# EAGLE board PCB_v29 (EAGLE 9.7.0)
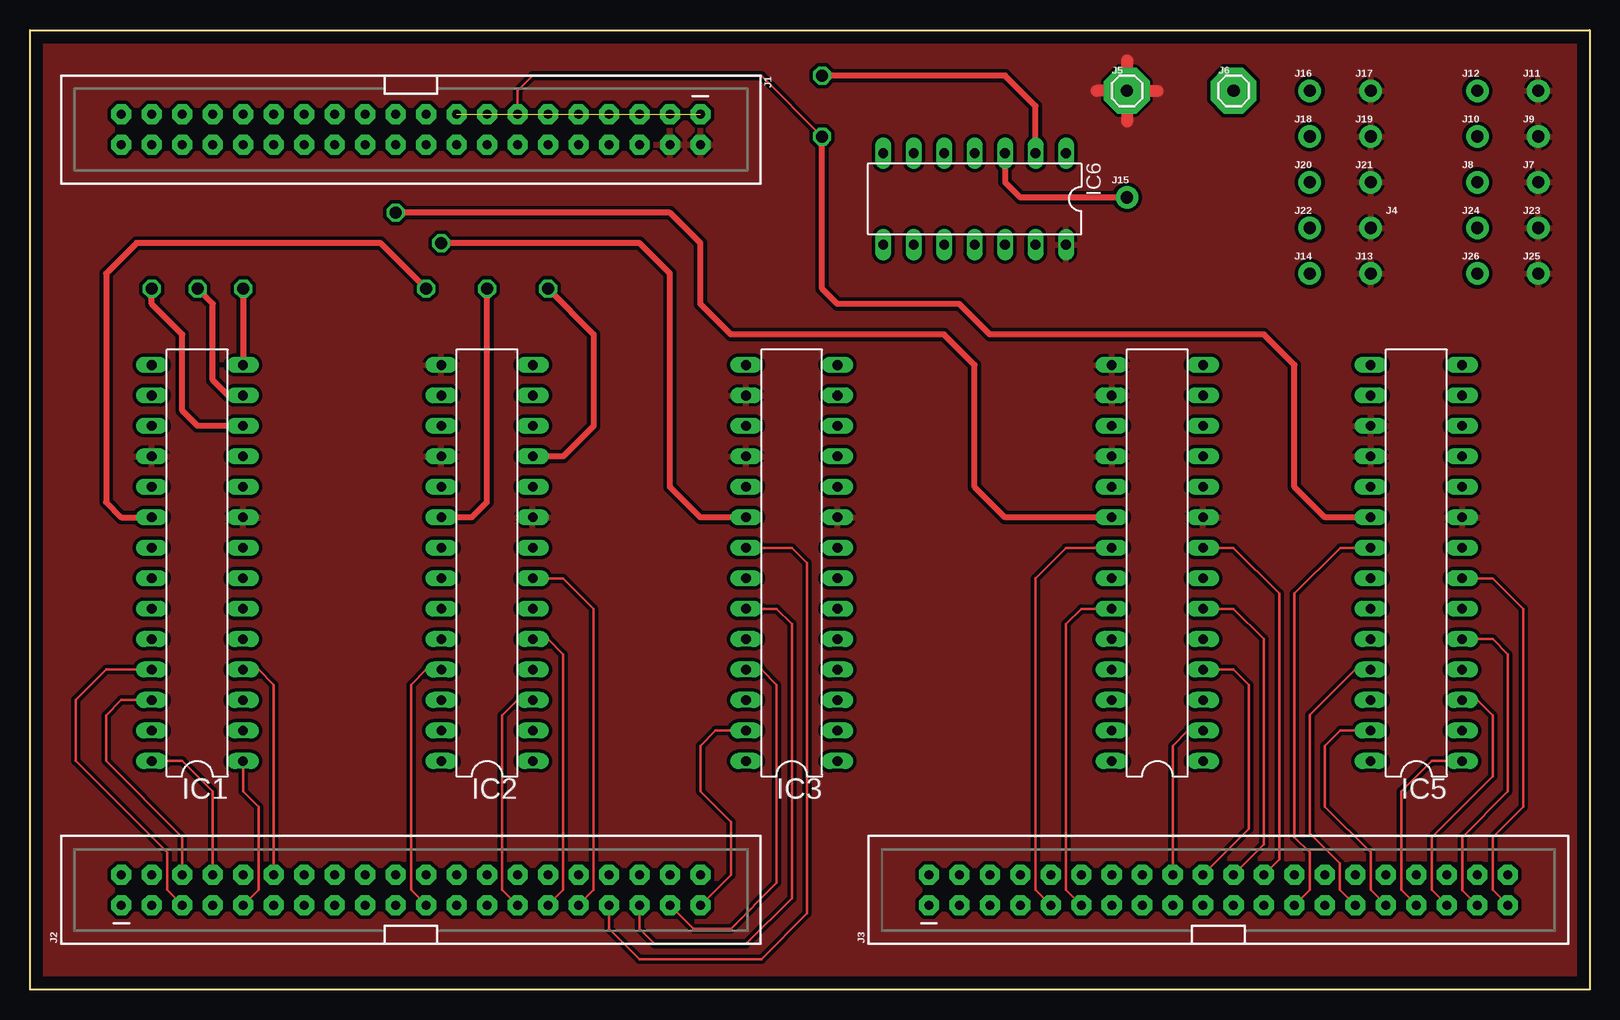
[diagram p0: board, top side]
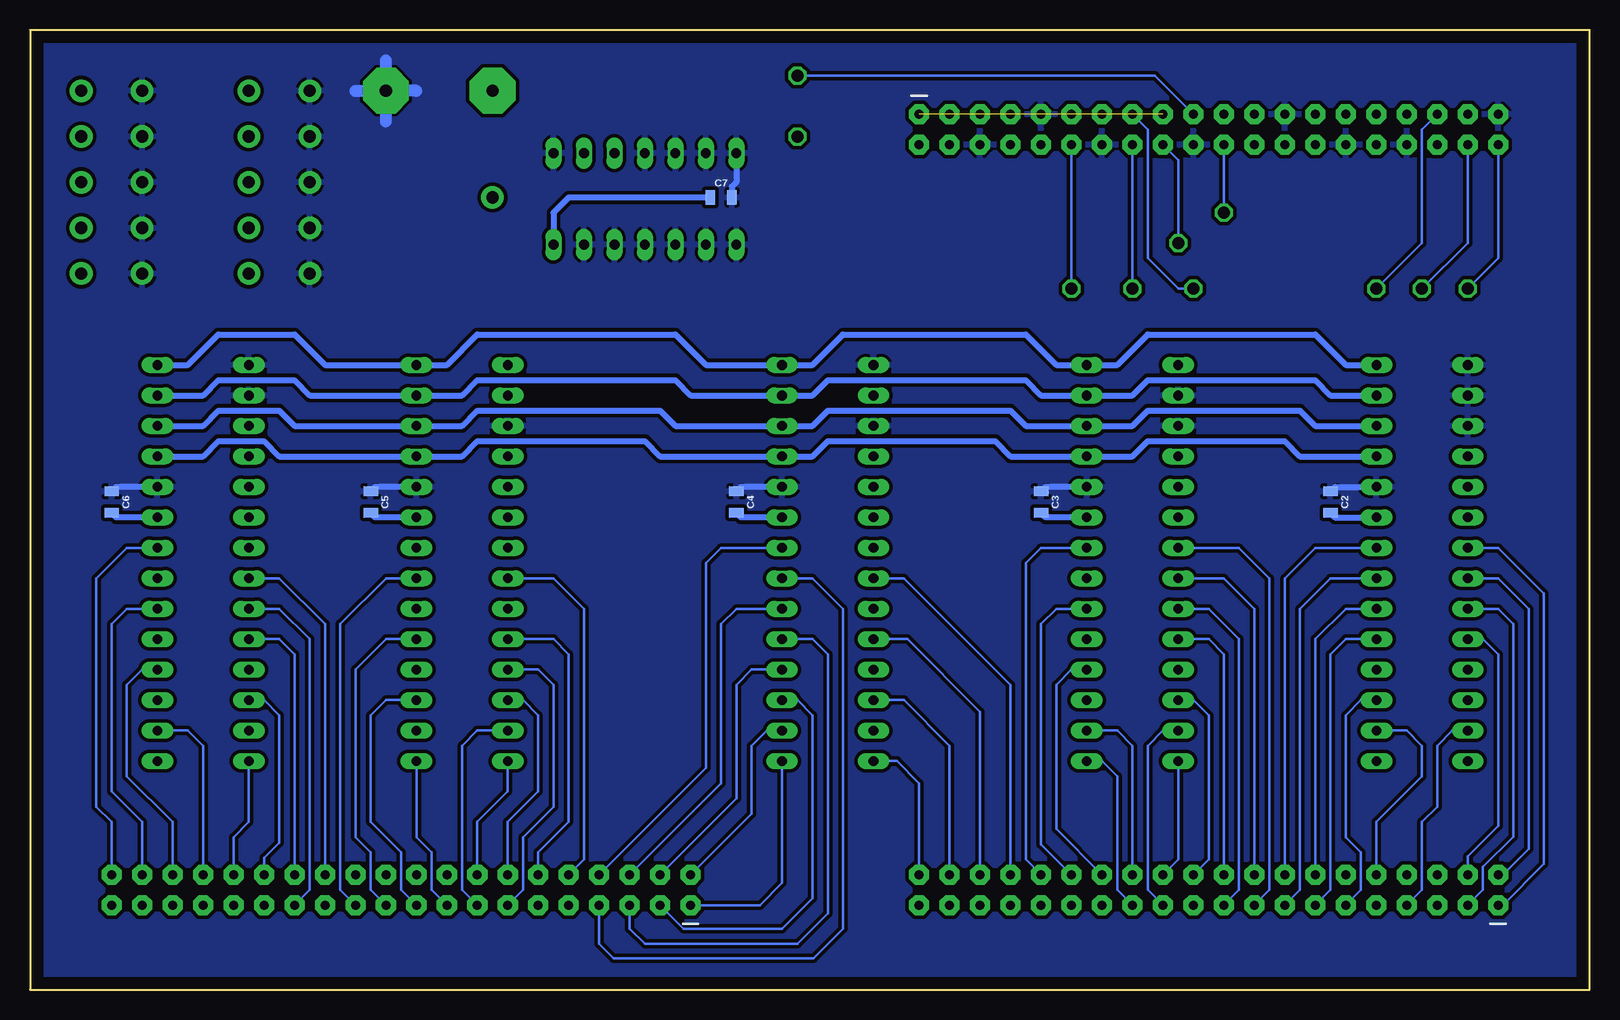
[diagram p1: board, bottom side, seen from below]

Size 130 x 80 mm. Coordinates in mm from the lower left corner, seen from the top.
Outline: 0,0 0,80 130,80 130,0 0,0
Copper layers (1*16): Top 0.035mm / dielectric 1.5mm / Bottom 0.035mm
Design rules "default": minimum track width 6mil, minimum drill 0.35mm, track to track 6mil, track to pad 6mil, pad to pad 6mil, via to via 6mil, smd to smd 6mil, copper to edge 40mil, drill to drill 6mil, minimum pad ring 10mil, minimum via ring 8mil, stop-mask expansion 4mil, vias tented up to drill 0mil, thermal gap 10mil

## Footprints (pad centres in the part's own frame; a part is rotated, then mirrored left to right if it is on the bottom)
0805 = smd 0.8 x 1.2: 1 -0.9,0; 2 0.9,0
DIL28-3 = drill 0.813 long: 1 -16.51,-3.81; 2 -13.97,-3.81; 3 -11.43,-3.81; 4 -8.89,-3.81; 5 -6.35,-3.81; 6 -3.81,-3.81; 7 -1.27,-3.81; 8 1.27,-3.81; 9 3.81,-3.81; 10 6.35,-3.81; 11 8.89,-3.81; 12 11.43,-3.81; 13 13.97,-3.81; 14 16.51,-3.81; 15 16.51,3.81; 16 13.97,3.81; 17 11.43,3.81; 18 8.89,3.81; 19 6.35,3.81; 20 3.81,3.81; 21 1.27,3.81; 22 -1.27,3.81; 23 -3.81,3.81; 24 -6.35,3.81; 25 -8.89,3.81; 26 -11.43,3.81; 27 -13.97,3.81; 28 -16.51,3.81
DIL14 = drill 0.813 long: 1 -7.62,-3.81; 2 -5.08,-3.81; 3 -2.54,-3.81; 4 0,-3.81; 5 2.54,-3.81; 6 5.08,-3.81; 7 7.62,-3.81; 8 7.62,3.81; 9 5.08,3.81; 10 2.54,3.81; 11 0,3.81; 12 -2.54,3.81; 13 -5.08,3.81; 14 -7.62,3.81
2X20_SHROUDED = drill 0.75 pad 1.676 octagon: 1 -1.27,24.13; 2 1.27,24.13; 3 -1.27,21.59; 4 1.27,21.59; 5 -1.27,19.05; 6 1.27,19.05; 7 -1.27,16.51; 8 1.27,16.51; 9 -1.27,13.97; 10 1.27,13.97; 11 -1.27,11.43; 12 1.27,11.43; 13 -1.27,8.89; 14 1.27,8.89; 15 -1.27,6.35; 16 1.27,6.35; 17 -1.27,3.81; 18 1.27,3.81; 19 -1.27,1.27; 20 1.27,1.27; 21 -1.27,-1.27; 22 1.27,-1.27; 23 -1.27,-3.81; 24 1.27,-3.81; 25 -1.27,-6.35; 26 1.27,-6.35; 27 -1.27,-8.89; 28 1.27,-8.89; 29 -1.27,-11.43; 30 1.27,-11.43; 31 -1.27,-13.97; 32 1.27,-13.97; 33 -1.27,-16.51; 34 1.27,-16.51; 35 -1.27,-19.05; 36 1.27,-19.05; 37 -1.27,-21.59; 38 1.27,-21.59; 39 -1.27,-24.13; 40 1.27,-24.13
1X01_NO_SILK = drill 1.016 pad 1.88: 1 0,0
1X01 = drill 1.016 pad 3.81 octagon: 1 0,0

## Placement (x,y rotation side)
C2  100nF  [0805]  21.59,40.64 270 bottom
C3  100nF  [0805]  45.72,40.64 270 bottom
C4  100nF  [0805]  71.12,40.64 270 bottom
C5  100nF  [0805]  101.6,40.64 270 bottom
C6  100nF  [0805]  123.19,40.64 270 bottom
C7  100nF  [0805]  72.39,66.04 0 bottom
IC1  MCP23S17SP  [DIL28-3]  13.95,35.56 90 top
IC2  MCP23S17SP  [DIL28-3]  38.1,35.56 90 top
IC3  MCP23S17SP  [DIL28-3]  63.5,35.56 90 top
IC4  MCP23S17SP  [DIL28-3]  93.98,35.56 90 top
IC5  MCP23S17SP  [DIL28-3]  115.57,35.56 90 top
IC6  74125N  [DIL14]  78.74,65.91 180 top
J1  RASPBERRYPI-40-PIN-GPIO_PTH  [2X20_SHROUDED]  31.75,71.7 270 top
J2  CONN_20X2SHROUDED  [2X20_SHROUDED]  31.75,8.31 90 top
J3  CONN_20X2SHROUDED  [2X20_SHROUDED]  99.06,8.31 90 top
J4  [1X01_NO_SILK]  111.76,63.5 0 top
J5  [1X01]  91.44,74.93 0 top
J6  [1X01]  100.33,74.93 0 top
J7  [1X01_NO_SILK]  125.73,67.31 0 top
J8  [1X01_NO_SILK]  120.65,67.31 0 top
J9  [1X01_NO_SILK]  125.73,71.12 0 top
J10  [1X01_NO_SILK]  120.65,71.12 0 top
J11  [1X01_NO_SILK]  125.73,74.93 0 top
J12  [1X01_NO_SILK]  120.65,74.93 0 top
J13  [1X01_NO_SILK]  111.76,59.69 0 top
J14  [1X01_NO_SILK]  106.68,59.69 0 top
J15  [1X01_NO_SILK]  91.44,66.04 0 top
J16  [1X01_NO_SILK]  106.68,74.93 0 top
J17  [1X01_NO_SILK]  111.76,74.93 0 top
J18  [1X01_NO_SILK]  106.68,71.12 0 top
J19  [1X01_NO_SILK]  111.76,71.12 0 top
J20  [1X01_NO_SILK]  106.68,67.31 0 top
J21  [1X01_NO_SILK]  111.76,67.31 0 top
J22  [1X01_NO_SILK]  106.68,63.5 0 top
J23  [1X01_NO_SILK]  125.73,63.5 0 top
J24  [1X01_NO_SILK]  120.65,63.5 0 top
J25  [1X01_NO_SILK]  125.73,59.69 0 top
J26  [1X01_NO_SILK]  120.65,59.69 0 top

## Library data of the parts
C2-C7 = SparkFun-Capacitors; PROD_ID: CAP-08469
IC1-IC5 = microchip; MF: MICROCHIP; MPN: MCP23S17-E/SP; OC_FARNELL: 1292238; OC_NEWARK: 31K2951
IC6 = 74xx-eu
J1 = SparkFun-Connectors_Ladestation; PROD_ID: CONN-12263; SF_ID: PRT-13054
J2 J3 = SparkFun-Connectors_Ladestation; PROD_ID: CONN-12263; SF_ID: CONN-12263
J4-J26 = SparkFun-Connectors_Ladestation

## Nets
3.3V: J1.1 J1.17
5V: C2.2 C3.2 C4.2 C5.2 C6.2 C7.1 IC1.9 IC1.18 IC2.9 IC2.15 IC2.18 IC3.9 IC3.16 IC3.18 IC4.9 IC4.15 IC4.16 IC4.18 IC5.9 IC5.17 IC5.18 IC6.14 J1.2 J1.4 J4.1 J5.1 J7.1 J9.1 J11.1 J13.1 J17.1 J19.1 J21.1 J23.1 J25.1
B$1: IC1.21 J2.1
B$2: IC1.22 J2.2
B$3: IC1.23 J2.3
B$4: IC1.24 J2.4
B$5: IC1.25 J2.5
B$6: IC1.26 J2.6
B$7: IC1.27 J2.7
B$8: IC1.28 J2.8
B$9: IC1.1 J2.9
B$10: IC1.2 J2.10
B$11: IC1.3 J2.11
B$12: IC1.4 J2.12
B$13: IC1.5 J2.13
B$14: IC1.6 J2.14
B$15: IC1.7 J2.15
B$16: IC1.8 J2.16
B$17: IC2.21 J2.17
B$18: IC2.22 J2.18
B$19: IC2.23 J2.19
B$20: IC2.24 J2.20
B$21: IC2.25 J2.21
B$22: IC2.26 J2.22
B$23: IC2.27 J2.23
B$24: IC2.28 J2.24
B$25: IC2.1 J2.25
B$26: IC2.2 J2.26
B$27: IC2.3 J2.27
B$28: IC2.4 J2.28
B$29: IC2.5 J2.29
B$30: IC2.6 J2.30
B$31: IC2.7 J2.31
B$32: IC2.8 J2.32
B$33: IC3.21 J2.33
B$34: IC3.22 J2.34
B$35: IC3.23 J2.35
B$36: IC3.24 J2.36
B$37: IC3.25 J2.37
B$38: IC3.26 J2.38
B$39: IC3.27 J2.39
B$40: IC3.28 J2.40
B$41: IC3.1 J3.1
B$42: IC3.2 J3.2
B$43: IC3.3 J3.3
B$44: IC3.4 J3.4
B$45: IC3.5 J3.5
B$46: IC3.6 J3.6
B$47: IC3.7 J3.7
B$48: IC3.8 J3.8
B$49: IC4.21 J3.9
B$50: IC4.22 J3.10
B$51: IC4.23 J3.11
B$52: IC4.24 J3.12
B$53: IC4.25 J3.13
B$54: IC4.26 J3.14
B$55: IC4.27 J3.15
B$56: IC4.28 J3.16
B$57: IC4.1 J3.17
B$58: IC4.2 J3.18
B$59: IC4.3 J3.19
B$60: IC4.4 J3.20
B$61: IC4.5 J3.21
B$62: IC4.6 J3.22
B$63: IC4.7 J3.23
B$64: IC4.8 J3.24
B$65: IC5.21 J3.25
B$66: IC5.22 J3.26
B$67: IC5.23 J3.27
B$68: IC5.24 J3.28
B$69: IC5.25 J3.29
B$70: IC5.26 J3.30
B$71: IC5.27 J3.31
B$72: IC5.28 J3.32
B$73: IC5.1 J3.33
B$74: IC5.2 J3.34
B$75: IC5.3 J3.35
B$76: IC5.4 J3.36
B$77: IC5.5 J3.37
B$78: IC5.6 J3.38
B$79: IC5.7 J3.39
B$80: IC5.8 J3.40
CS: IC1.11 IC2.11 IC3.11 IC4.11 IC5.11 J1.12
GND: C2.1 C3.1 C4.1 C5.1 C6.1 C7.2 IC1.10 IC1.15 IC1.16 IC1.17 IC2.10 IC2.16 IC2.17 IC3.10 IC3.15 IC3.17 IC4.10 IC4.17 IC5.10 IC5.15 IC5.16 IC6.1 IC6.4 IC6.5 IC6.6 IC6.7 IC6.8 IC6.9 IC6.10 IC6.11 IC6.12 IC6.13 J1.6 J1.9 J1.14 J1.20 J1.25 J1.30 J1.34 J1.39 J6.1 J8.1 J10.1 J12.1 J14.1 J16.1 J18.1 J20.1 J22.1 J24.1 J26.1
INTA: IC1.20 J1.15
INTA1: IC2.20 J1.16
INTA2: IC3.20 J1.18
INTA3: IC4.20 J1.22
INTA4: IC5.20 J1.13
N$1: IC6.2 J1.19
N$2: IC6.3 J15.1
SCK: IC1.12 IC2.12 IC3.12 IC4.12 IC5.12 J1.40
SI: IC1.13 IC2.13 IC3.13 IC4.13 IC5.13 J1.38
SO: IC1.14 IC2.14 IC3.14 IC4.14 IC5.14 J1.35

## Tracks (layer width: path | path; a pad name or v marks a point on that pad's centre or on a via)
3.3V  (1 unrouted)
5V
  Top 1.016: J5.1 93.98,74.93 | 91.44,77.47 J5.1 | J5.1 88.9,74.93 | J5.1 91.44,72.39
  Bottom 0.508: IC2.9 45.35,39.37 C3.2 | IC3.9 70.75,39.37 C4.2 | IC4.9 101.23,39.37 C5.2 | IC5.9 122.82,39.37 C6.2 | IC1.9 21.22,39.37 C2.2 | C7.1 85.09,66.04 86.36,64.77 IC6.14
  pour Top (isolate 0.305, rank 2): 0.25,0.25 129.75,0.25 129.75,79.75 0.25,79.75
B$1
  Bottom 0.2: IC1.21 7.62,36.83 3.81,33.02 3.81,10.46 7.24,7.04 J2.1
B$2
  Bottom 0.2: IC1.22 7.62,34.29 5.08,31.75 5.08,11.73 7.24,9.58 J2.2
B$3
  Bottom 0.2: IC1.23 7.62,31.75 6.35,30.48 6.35,12.75 8.89,10.21 8.89,8.31 J2.3
B$4
  Bottom 0.2: IC1.24 8.89,29.21 7.62,27.94 7.62,24.13 7.62,13.64 10.16,11.1 J2.4
B$5
  Top 0.2: J2.5 11.43,8.31 11.43,11.43 3.81,19.05 3.81,24.13 6.35,26.67 IC1.25
B$6
  Top 0.2: IC1.26 7.62,24.13 6.35,22.86 6.35,19.05 12.7,12.7 J2.6
B$7
  Bottom 0.2: IC1.27 11.43,21.59 12.7,20.32 12.7,15.24 13.97,13.97 13.97,8.31 J2.7
B$8
  Top 0.2: J2.8 15.24,16.51 12.7,19.05 IC1.28
B$9
  Top 0.2: J2.9 19.05,8.31 19.05,15.24 17.78,16.51 17.78,19.03 IC1.1
B$10
  Bottom 0.2: IC1.2 15.24,21.59 13.97,20.32 13.97,17.78 17.78,13.97 J2.10
B$11
  Bottom 0.2: IC1.3 19.05,24.13 20.32,22.86 20.32,12.7 19.05,11.43 19.05,8.31 J2.11
B$12
  Top 0.2: IC1.4 19.05,26.67 20.32,25.4 J2.12
B$13
  Bottom 0.2: IC1.5 20.32,29.21 21.59,27.94 21.59,8.31 J2.13
B$14
  Bottom 0.2: IC1.6 20.32,31.75 22.86,29.21 J2.14
B$15
  Bottom 0.2: IC1.7 21.59,34.29 24.13,31.75 24.13,8.31 J2.15
B$16
  Bottom 0.2: IC1.8 22.86,36.83 25.4,34.29 J2.16
B$17
  Bottom 0.2: IC2.21 29.21,36.83 26.67,34.29 26.67,8.31 J2.17
B$18
  Bottom 0.2: IC2.22 30.48,34.29 27.94,31.75 J2.18
B$19
  Bottom 0.2: IC2.23 31.75,31.75 29.21,29.21 29.21,8.31 J2.19
B$20
  Bottom 0.2: IC2.24 31.75,29.21 30.48,27.94 J2.20
B$21
  Top 0.2: J2.21 31.75,8.31 31.75,25.4 33.02,26.67 IC2.25
B$22
  Bottom 0.2: IC2.26 33.02,24.13 31.75,22.86 31.75,10.85 J2.22
B$23
  Bottom 0.2: J2.23 36.83,8.31 36.83,20.32 35.56,21.59 IC2.27
B$24
  Bottom 0.2: IC2.28 34.29,10.85 J2.24
B$25
  Bottom 0.2: J2.25 39.37,8.31 39.37,17.78 40.64,19.05 IC2.1
B$26
  Bottom 0.2: IC2.2 39.37,21.59 38.1,20.32 J2.26
B$27
  Top 0.2: J2.27 39.37,8.31 39.37,22.86 40.64,24.13 IC2.3
B$28
  Bottom 0.2: IC2.4 43.18,26.67 44.45,25.4 44.45,13.39 J2.28
B$29
  Top 0.2: IC2.5 43.18,29.21 44.45,27.94 44.45,8.31 J2.29
B$30
  Bottom 0.2: IC2.6 44.45,31.75 45.72,30.48 45.72,12.12 J2.30
B$31
  Top 0.2: IC2.7 44.45,34.29 46.99,31.75 46.99,8.31 J2.31
B$32
  Bottom 0.2: J2.32 46.99,10.85 46.99,35.56 45.72,36.83 IC2.8
B$33
  Top 0.2: IC3.21 63.5,36.83 64.77,35.56 64.77,6.35 60.96,2.54 50.8,2.54 48.26,5.08 J2.33
B$34
  Bottom 0.2: IC3.22 57.15,34.29 48.26,25.4 J2.34
B$35
  Top 0.2: IC3.23 62.23,31.75 63.5,30.48 63.5,7.62 59.69,3.81 52.07,3.81 50.8,5.08 J2.35
B$36
  Bottom 0.2: IC3.24 56.84,29.21 50.8,23.16 J2.36
B$37
  Top 0.2: IC3.25 60.96,26.67 62.23,25.4 62.23,8.89 58.42,5.08 55.3,5.08 J2.37
B$38
  Bottom 0.2: IC3.26 57.15,24.13 53.34,20.32 J2.38
B$39
  Top 0.2: J2.39 58.42,9.58 58.42,13.97 55.88,16.51 55.88,20.32 57.15,21.59 IC3.27
B$40
  Bottom 0.2: IC3.28 57.73,19.05 55.88,17.2 J2.40
B$41
  Bottom 0.2: IC3.1 67.31,8.89 69.16,7.04 J3.1
B$42
  Bottom 0.2: IC3.2 68.58,21.59 69.85,20.32 69.85,14.66 J3.2
B$43
  Bottom 0.2: IC3.3 66.04,24.13 64.77,22.86 64.77,7.62 67.31,5.08 75.51,5.08 J3.3
B$44
  Bottom 0.2: IC3.4 69.85,26.67 71.12,25.4 71.12,15.93 J3.4
B$45
  Bottom 0.2: IC3.5 64.77,29.21 63.5,27.94 63.5,6.35 66.04,3.81 78.74,3.81 80.01,5.08 J3.5
B$46
  Bottom 0.2: IC3.6 71.12,31.75 72.39,30.48 72.39,17.2 J3.6
B$47
  Bottom 0.2: IC3.7 64.77,34.29 62.23,31.75 62.23,5.08 64.69,2.62 81.36,2.62 82.55,3.81 J3.7
B$48
  Bottom 0.2: IC3.8 72.39,36.83 73.66,35.56 73.66,18.47 J3.8
B$49
  Top 0.2: IC4.21 86.36,36.83 83.82,34.29 83.82,8.31 J3.9
B$50
  Bottom 0.2: J3.10 83.82,10.85 83.82,31.75 86.36,34.29 IC4.22
B$51
  Top 0.2: J3.11 86.36,8.31 86.36,30.48 87.63,31.75 IC4.23
B$52
  Bottom 0.2: IC4.24 86.36,29.21 85.09,27.94 85.09,13.97 87.63,11.43 J3.12
B$53
  Bottom 0.2: IC4.25 87.63,26.67 86.36,25.4 86.36,15.24 88.9,12.7 88.9,8.31 J3.13
B$54
  Bottom 0.2: IC4.26 88.9,24.13 87.63,22.86 87.63,16.51 90.17,13.97 J3.14
B$55
  Bottom 0.2: IC4.27 92.71,21.59 93.98,20.32 93.98,8.31 J3.15
B$56
  Bottom 0.2: J3.16 92.71,13.97 90.17,16.51 IC4.28
B$57
  Bottom 0.2: J3.17 96.52,8.31 96.52,11.43 97.79,12.7 IC4.1
B$58
  Top 0.2: J3.18 95.25,20.32 96.52,21.59 IC4.2
B$59
  Bottom 0.2: J3.19 99.06,8.31 99.06,11.43 101.6,13.97 101.6,22.86 100.33,24.13 IC4.3
B$60
  Top 0.2: J3.20 101.6,13.39 101.6,25.4 100.33,26.67 IC4.4
B$61
  Bottom 0.2: J3.21 101.6,8.31 101.6,11.43 102.87,12.7 102.87,26.67 100.33,29.21 IC4.5
B$62
  Top 0.2: IC4.6 100.33,31.75 102.87,29.21 102.87,12.12 J3.22
B$63
  Bottom 0.2: IC4.7 100.33,34.29 104.14,30.48 104.14,8.31 J3.23
B$64
  Top 0.2: IC4.8 100.33,36.83 104.14,33.02 104.14,10.85 J3.24
B$65
  Top 0.2: J3.25 106.68,8.31 106.68,11.43 105.41,12.7 105.41,33.02 109.22,36.83 IC5.21
B$66
  Bottom 0.2: J3.26 105.41,30.48 109.22,34.29 IC5.22
B$67
  Bottom 0.2: J3.27 106.68,8.31 106.68,29.21 109.22,31.75 IC5.23
B$68
  Bottom 0.2: IC5.24 109.22,29.21 107.95,27.94 J3.28
B$69
  Top 0.2: IC5.25 110.47,26.67 106.68,22.89 106.68,13.04 109.19,10.52 109.19,8.33 J3.29
B$70
  Bottom 0.2: J3.30 110.49,10.97 109.22,12.24 109.22,22.86 110.49,24.13 IC5.26
B$71
  Top 0.2: J3.31 111.76,8.31 111.76,11.43 107.95,15.24 107.95,20.32 109.22,21.59 IC5.27
B$72
  Bottom 0.2: IC5.28 111.76,13.97 113.03,12.7 J3.32
B$73
  Top 0.2: J3.33 114.3,8.31 114.3,16.51 116.84,19.05 IC5.1
B$74
  Bottom 0.2: J3.34 115.57,20.32 116.84,21.59 IC5.2
B$75
  Top 0.2: J3.35 116.84,8.31 116.84,12.7 121.92,17.78 121.92,22.86 120.65,24.13 IC5.3
B$76
  Bottom 0.2: J3.36 118.11,13.97 121.92,17.78 121.92,25.4 120.65,26.67 IC5.4
B$77
  Top 0.2: IC5.5 121.92,29.21 123.19,27.94 123.19,16.51 119.38,12.7 119.38,11.43 119.41,11.4 119.41,8.28 J3.37
B$78
  Bottom 0.2: J3.38 120.65,13.97 123.19,16.51 123.19,30.48 121.92,31.75 IC5.6
B$79
  Top 0.2: J3.39 121.92,8.31 121.92,12.7 124.46,15.24 124.46,31.75 121.92,34.29 IC5.7
B$80
  Bottom 0.2: J3.40 123.19,13.97 124.46,15.24 124.46,34.29 121.92,36.83 IC5.8
CS  (via drill 1)
  Top 0.508: v43.18,58.42 46.99,54.61 46.99,46.99 44.45,44.45 IC2.11
  Bottom 0.2: J1.12 v43.18,58.42
  Bottom 0.508: IC1.11 24.13,44.45 25.4,45.72 36.83,45.72 38.1,44.45 IC2.11 48.26,44.45 49.53,45.72 63.5,45.72 64.77,44.45 IC3.11 77.47,44.45 78.74,45.72 92.71,45.72 93.98,44.45 IC4.11 109.22,44.45 110.49,45.72 114.3,45.72 115.57,44.45 IC5.11
GND
  Bottom 0.152: C2.1 21.22,41.91
  Bottom 0.508: IC2.10 45.35,41.91 C3.1 | IC3.10 70.75,41.91 C4.1 | IC4.10 101.23,41.91 C5.1 | IC5.10 122.82,41.91 C6.1 | 21.22,41.91 IC1.10 | IC6.7 71.12,67.31 71.49,66.94 C7.2
  Bottom 1.016: 100.33,72.39 J6.1 | 97.79,74.93 J6.1 | 102.87,74.93 J6.1 | J6.1 100.33,77.47
  pour Bottom (isolate 0.305): 0.25,0.25 129.75,0.25 129.75,79.75 0.25,79.75
INTA  (via drill 1)
  Top 0.508: v33.02,58.42 29.21,62.23 8.89,62.23 6.35,59.69 6.35,40.64 7.62,39.37 IC1.20
  Bottom 0.2: J1.15 36.83,71.7 36.83,60.96 34.29,58.42 v33.02,58.42
INTA1  (via drill 1)
  Top 0.508: v38.1,58.42 38.1,40.64 36.83,39.37 IC2.20
  Bottom 0.2: J1.16 v38.1,58.42
INTA2  (via drill 1)
  Top 0.508: IC3.20 55.88,39.37 53.34,41.91 53.34,59.69 50.8,62.23 v34.29,62.23
  Bottom 0.2: J1.18 34.29,69.16 v34.29,62.23
INTA3  (via drill 1)
  Top 0.508: IC4.20 81.28,39.37 78.74,41.91 78.74,52.07 76.2,54.61 58.42,54.61 55.88,57.15 55.88,62.23 53.34,64.77 v30.48,64.77
  Bottom 0.2: J1.22 v30.48,64.77
INTA4  (via drill 1)
  Top 0.2: J1.13 40.64,74.93 41.91,76.2 60.96,76.2 v66.04,71.12
  Top 0.508: IC5.20 107.95,39.37 105.41,41.91 105.41,52.07 102.87,54.61 80.01,54.61 77.47,57.15 67.31,57.15 66.04,58.42 v66.04,71.12
N$1  (via drill 1)
  Top 0.508: IC6.2 83.82,73.66 81.28,76.2 v66.04,76.2
  Bottom 0.2: J1.19 36.25,76.2 v66.04,76.2
N$2
  Top 0.508: J15.1 82.55,66.04 81.28,67.31 IC6.3
SCK  (via drill 1)
  Top 0.508: IC1.12 13.97,46.99 12.7,48.26 12.7,54.61 10.16,57.15 v10.16,58.42
  Bottom 0.2: v10.16,58.42 7.62,60.96 J1.40
  Bottom 0.508: IC1.12 22.86,46.99 24.13,48.26 36.83,48.26 38.1,46.99 IC2.12 46.99,46.99 48.26,48.26 63.5,48.26 64.77,46.99 IC3.12 76.2,46.99 77.47,48.26 92.71,48.26 93.98,46.99 IC4.12 107.95,46.99 109.22,48.26 114.3,48.26 115.57,46.99 IC5.12
SI  (via drill 1)
  Top 0.508: v13.97,58.42 15.24,57.15 15.24,50.8 16.51,49.53 IC1.13
  Bottom 0.2: v13.97,58.42 10.16,62.23 J1.38
  Bottom 0.508: IC5.13 115.57,49.53 114.3,50.8 107.95,50.8 106.68,49.53 IC4.13 93.98,49.53 92.71,50.8 76.2,50.8 74.93,49.53 IC3.13 64.77,49.53 63.5,50.8 46.99,50.8 45.72,49.53 IC2.13 38.1,49.53 36.83,50.8 22.86,50.8 21.59,49.53 IC1.13
SO  (via drill 1)
  Top 0.508: v17.78,58.42 17.78,52.09 IC1.14
  Bottom 0.2: J1.35 13.97,71.7 13.97,62.23 v17.78,58.42
  Bottom 0.508: IC5.14 116.84,52.07 114.3,54.61 107.95,54.61 105.41,52.07 IC4.14 95.25,52.07 92.71,54.61 76.2,54.61 73.66,52.07 IC3.14 64.77,52.07 62.23,54.61 46.99,54.61 44.45,52.07 IC2.14 39.37,52.07 36.83,54.61 22.86,54.61 20.32,52.07 IC1.14